# Altium PCB valix_PCB1_Layout1.PcbDoc (part 3 of 3)
Units mil, origin at the board's own origin, x right, y up, seen from the top; angles counter-clockwise.
Board outline 4500 x 2000 mil, 10 copper layers (Top Layer, L2 IntP, L3 Sig, L4 IntP GND, L5 Sig, L6 IntP GND, L7 IntP pwr, L8 Sig, L9 IntP GND, Bottom Layer), stack 81.302 mil thick; 152 components, 166 nets, 818 pads, 544 vias.
Unrouted connection lines stored in the file: 42.
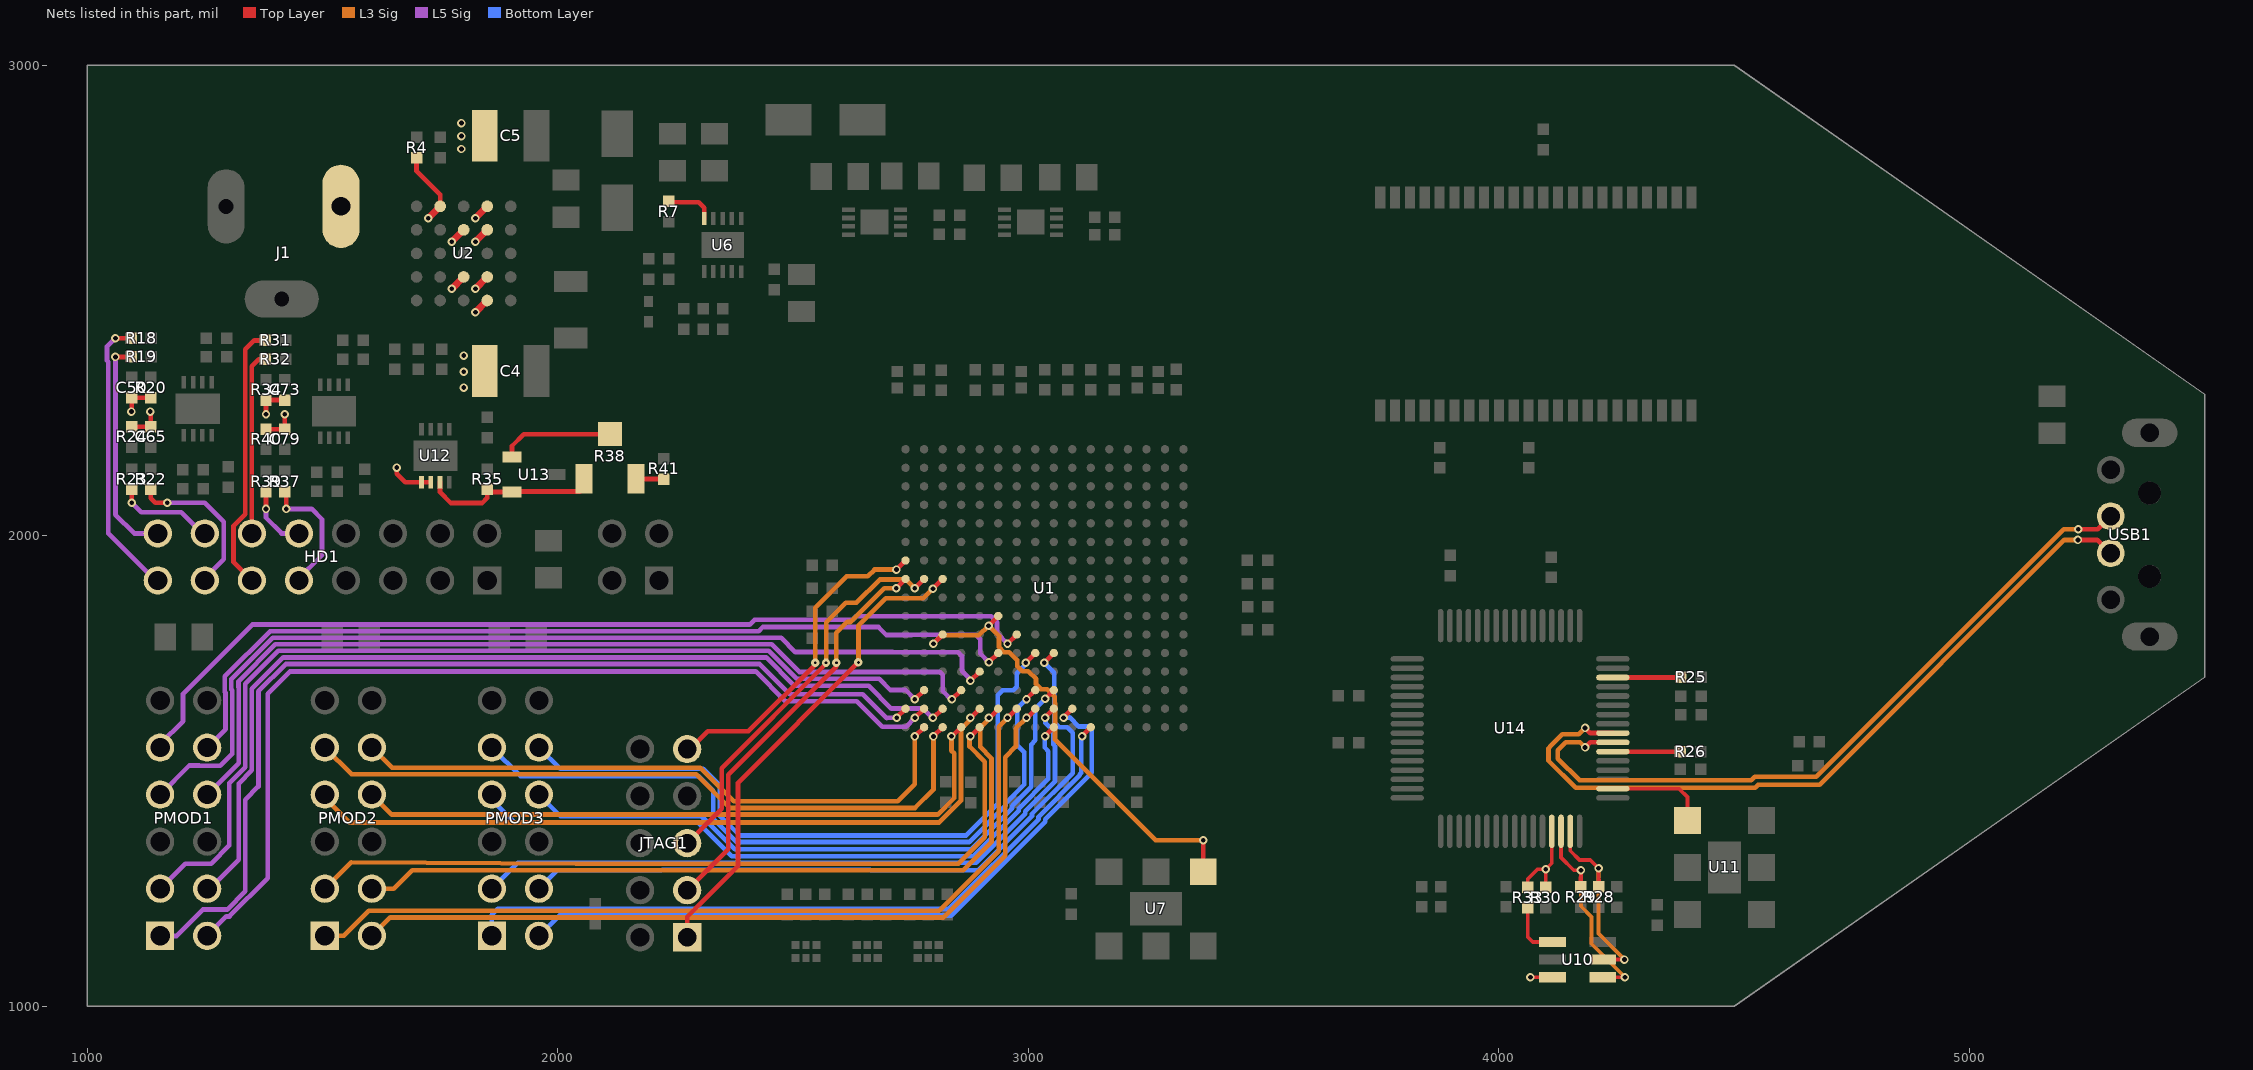
[diagram p11: the nets of this part, all layers, seen from the top]

## Via types
v1: diameter 18, hole 10, Top Layer to Bottom Layer, 261 vias
v2: diameter 18, hole 10, Top Layer to Bottom Layer, tented top, 261 vias
v3: diameter 19.68, hole 7.87, Top Layer to Bottom Layer, 12 vias
v4: diameter 18, hole 6, Top Layer to Bottom Layer, 10 vias

## Nets (pads, with @x,y where several pads share a name; then routed paths per layer and width w, separated by ;. In a path a pad name is that pad's centre, name@x,y a point inside that pad or via, vN(x,y) a via of type N, cw(c..) or ccw(c..) an arc to the next point about the centre after c; other vN are vias at no path point) (continued)
NetR4_1: R4.1 U2.E4 | length 159.4
  Top Layer w10: R4.1@1700,2803.35 1700,2775 1750,2725 U2.E4@1750,2700
  Top Layer w15: v1(1725,2675) U2.E4@1750,2700
NetR7_1: R7.1 U6.5 | length 103.1
  Top Layer w10: R7.1@2236.22,2710.63 2238.19,2708.66 2299.21,2708.66 2311.02,2696.85 U6.5@2311.02,2674.21
NetR25_2: R25.2 U14.14 | length 143.7
  Top Layer w10: U14.14@4242.13,1698.82 R25.2@4385.83,1698.82
NetR26_2: R26.2 U14.6 | length 142.9
  Top Layer w10: U14.6@4242.13,1541.34 R26.2@4385.01,1541.34
NetR28_2: R28.2 U10.5 U14.63 | length 419.1
  Top Layer w8: U14.63@4151.57,1372.05 4151.57,1330.71 4171.26,1311.02 4193.9,1311.02 v1(4211.61,1293.31) 4211.61,1270.67 ; U10.5@4220.47,1099.41 v1(4266.73,1099.41)
  Top Layer w10: R28.2@4212.06,1253.65 4212.06,1270.22
  L3 Sig w8: v1(4211.61,1293.31) 4211.61,1154.53 v1(4266.73,1099.41)
NetR29_2: R29.2 U10.4 U14.62 | length 458.1
  Top Layer w8: U14.62@4131.89,1372.05 4131.89,1316.31 4158.83,1289.37 v1(4174.21,1289.37) 4174.21,1274.29 ; U10.4@4220.47,1062.01 v1(4267.72,1062.01)
  Top Layer w10: R29.2@4174.06,1253.65 4174.06,1274.14
  L3 Sig w8: v1(4174.21,1289.37) 4174.21,1212.6 4196.85,1189.96 4196.85,1132.87 v1(4267.72,1062.01)
NetR30_2: R30.2 R33.1 U10.3 U14.61 | length 236.3
  Top Layer w8: R33.1@4061.02,1252.95 4061.02,1270.67 4081.69,1291.34 v1(4099.41,1291.34) ; v1(4066.93,1062.01) U10.3@4114.17,1062.01 ; R30.2@4099.41,1252.95 v1(4099.41,1291.34) ; U14.61@4112.2,1372.05 4112.2,1304.13 v1(4099.41,1291.34)
NetR33_2: R33.2 U10.1 | length 119.6
  Top Layer w8: R33.2@4061.02,1209.65 4061.02,1147.64 4071.85,1136.81 U10.1@4114.17,1136.81
NetR35_2: R35.2 R38.1 U12.3 U13.2 | length 384.4
  Top Layer w10: U12.3@1749.84,2113.9 1749.84,2092.81 1773.06,2069.6 1839.28,2069.6 1850,2080.31 R35.2@1850,2098.35 1852.65,2098.35 1858,2093 1902.35,2093 1903.35,2094 2047,2094 2057,2104 2055.87,2105.13 R38.1@2055.87,2120.79
NetR38_2: R38.2 U13.1 | length 242.2
  Top Layer w10: U13.1@1902.76,2167.4 1902.76,2190.76 1928,2216 2110.53,2216 R38.2@2110.98,2216.46
NetR38_3: R38.3 R41.1 | length 59.1
  Top Layer w10: R38.3@2166.1,2120.79 2224.56,2120.79 R41.1@2225,2120.35
NetU1_K6: U1.K6 U1.L3 U7.4 | length 981.9
  Top Layer w10: v2@2799.21,1771.48 U1.L3@2817.85,1790.12 ; v2(2915.53,1809.06) U1.K6@2935.96,1829.49 ; U7.4@3371.55,1285.94 v1(3371.55,1352.85)
  L3 Sig w10: v2(2798.23,1770.67) 2815.99,1788.43 2894.91,1788.43 v2(2915.53,1809.06) 2937.71,1786.87 2937.71,1763.04 2948.25,1752.5 2959.67,1752.5 2976.27,1735.9 2976.27,1722.86 2986.81,1712.32 2999.85,1712.32 3016.45,1695.72 3016.45,1684.47 3026.99,1673.93 3040.33,1673.93 3056,1658.26 3056,1645.11 3056.8,1644.31 3056.8,1566.36 3270.32,1352.85 v1(3371.55,1352.85)
NetU11_4: U11.4 U14.2 | length 215.4
  Top Layer w8: U14.2@4242.13,1462.6 4382.87,1462.6 4400.59,1444.88 U11.4@4400.59,1395.28
PMOD1-1: PMOD1.1 U1.R1 | length 2112.6
  Top Layer w10: v2(2720.47,1613.19) 2720.47,1614 U1.R1@2739.11,1632.64
  L5 Sig w10: PMOD1.1@1155,1150 1155.39,1149.61 1189.96,1149.61 1246.06,1205.71 1297.24,1205.71 1335.85,1244.31 1335.85,1439.2 1364,1467.35 1364,1669.12 1422.24,1727.36 2429.13,1727.36 2493.11,1663.39 2647.64,1663.39 2698.82,1612.2 2699.8,1613.19 v2(2720.47,1613.19)
PMOD1-2: PMOD1.2 U1.R2 | length 2050.2
  Top Layer w10: v2(2759.03,1613.19) U1.R2@2778.48,1632.64
  L5 Sig w10: PMOD1.2@1255,1150 1296,1191 1302.33,1191 1383.86,1272.52 1383.86,1664.37 1431.1,1711.61 2420.28,1711.61 2483.27,1648.62 2634.84,1648.62 2689.26,1594.2 2740.05,1594.2 v2(2759.03,1613.19)
PMOD1-3: PMOD1.3 U1.P2 | length 2065.2
  Top Layer w10: v2(2758.86,1652.39) U1.P2@2778.48,1672.01
  L5 Sig w10: PMOD1.3@1155,1250 1155.51,1250 1208.66,1303.15 1263.3,1303.15 1302.17,1342.01 1302.17,1474.41 1336,1508.24 1336,1683.55 1335.63,1683.92 1335.63,1685.04 1405.95,1755.36 2448.49,1755.36 2507.99,1695.87 2683.07,1695.87 2706.69,1672.24 2739,1672.24 v2(2758.86,1652.39)
PMOD1-4: PMOD1.4 U1.R3 | length 2023.8
  Top Layer w10: v2(2797.24,1613.19) 2798.4,1613.19 U1.R3@2817.85,1632.64
  L5 Sig w10: PMOD1.4@1255,1250 1260.15,1250 1321.85,1311.7 1321.85,1473.43 1350,1501.57 1350,1674.92 1416.45,1741.36 2442.69,1741.36 2502.95,1681.1 2660.43,1681.1 2708.66,1632.87 2776.4,1632.87 2796.09,1613.19 v2(2797.24,1613.19)
PMOD1-7: PMOD1.7 U1.N5 | length 2042.1
  Top Layer w10: v2(2876.97,1691.76) U1.N5@2896.59,1711.38
  L5 Sig w10: PMOD1.7@1155,1450 1216.81,1511.81 1238.03,1511.81 1238.85,1511 1282.65,1511 1308,1536.35 1308,1671.95 1306.43,1673.53 1306.43,1695.43 1394.36,1783.36 2474.51,1783.36 2504.92,1752.95 2711.45,1752.95 2711.97,1752.43 2850.91,1752.43 2858.91,1744.44 2858.91,1713.06 2876.97,1695 v2(2876.97,1691.76)
PMOD1-8: PMOD1.8 U1.P4 | length 1914.5
  Top Layer w10: v2@2836.61,1651.4 U1.P4@2857.22,1672.01
  L5 Sig w10: PMOD1.8@1255,1450 1322,1517 1322,1677.75 1321.63,1678.12 1321.63,1690.84 1400.15,1769.36 2454.29,1769.36 2513.02,1710.63 2812.01,1710.63 2817.91,1704.72 2817.91,1670.1 v2@2836.61,1651.4
  other v2: 2837.6,1652.56
PMOD1-9: PMOD1.9 U1.L7 | length 2021
  Top Layer w10: v2(2955.71,1770.5) U1.L7@2975.33,1790.12
  L5 Sig w10: PMOD1.9@1155,1550 1155,1557.56 1203.74,1606.3 1203.74,1664.37 1350.73,1811.36 2407.82,1811.36 2418.13,1821.67 2500.32,1821.67 2500.65,1821.33 2626.69,1821.33 2634.38,1829.02 2921.01,1829.02 2933.53,1816.51 2933.53,1792.68 v2(2955.71,1770.5)
PMOD1-10: PMOD1.10 U1.M6 | length 1912.8
  Top Layer w10: v2(2916.34,1731.13) U1.M6@2935.96,1750.75
  L5 Sig w10: PMOD1.10@1255,1550 1294,1589 1294,1666.15 1292.43,1667.73 1292.43,1701.23 1388.56,1797.36 2426.7,1797.36 2435.44,1806.1 2681.35,1806.1 2698.54,1788.91 2751.82,1788.91 2752.56,1789.65 2888.5,1789.65 2897.64,1780.51 2897.64,1749.83 v2(2916.34,1731.13)
PMOD2-1: PMOD2.1 U1.R7 | length 1825.2
  Top Layer w10: v2@2955.88,1613.19 U1.R7@2975.33,1632.64
  L3 Sig w10: PMOD2.1@1505,1150 1545.67,1150 1598.67,1203 2810.28,1203 2936.79,1329.5 2936.79,1594.09 v2@2955.88,1613.19
  other v2: 2955.71,1613.19
PMOD2-2: PMOD2.2 U1.R8 | length 1754.1
  Top Layer w10: v2@2996.21,1612.28 U1.R8@3014.7,1630.78
  L3 Sig w10: PMOD2.2@1605,1150 1644,1189 2819.91,1189 2950.79,1319.88 2950.79,1529.53 2973.65,1552.39 2973.65,1590.77 2995.16,1612.28 v2@2996.21,1612.28
  other v2: 2996.06,1613.19
PMOD2-3: PMOD2.3 U1.T5 | length 1705.4
  Top Layer w10: v2@2875,1571.68 U1.T5@2896.59,1593.27
  L3 Sig w10: PMOD2.3@1505,1250 1561.1,1306.1 2038.39,1303.15 2851.38,1303.15 2907.48,1359.25 2907.48,1519.69 2875,1552.17 v2@2875,1571.68
  other v2: 2876.97,1573.82
PMOD2-4: PMOD2.4 U1.R6 | length 1667.1
  Top Layer w10: v2@2916.48,1612.28 2935.96,1631.76 U1.R6@2935.96,1632.64
  L3 Sig w10: PMOD2.4@1605,1250 1651.57,1250 1690.57,1289 2861.83,1289 2921.48,1348.65 2921.48,1527.34 2897.64,1551.18 2897.64,1592.52 2916.48,1611.36 v2@2916.48,1612.28
  other v2: 2916.34,1613.19
PMOD2-7: PMOD2.7 U1.R5 | length 1608.2
  Top Layer w10: v2@2876.16,1612.2 U1.R5@2896.59,1632.64
  L3 Sig w10: PMOD2.7@1505,1450 1505,1442.83 1557.09,1390.75 2810.15,1390.75 2857,1437.59 2857,1589.68 v2@2876.16,1608.83
  other v2: 2876.97,1613.19
PMOD2-8: PMOD2.8 U1.T4 | length 1431.7
  Top Layer w10: v2(2836.61,1573.82) 2837.77,1573.82 U1.T4@2857.22,1593.27
  L3 Sig w10: PMOD2.8@1605,1450 1647.52,1407.48 2807.09,1407.48 2842.36,1442.76 2842.36,1537.56 2836.61,1543.31 v2(2836.61,1573.82)
PMOD2-9: PMOD2.9 U1.T3 | length 1503.4
  Top Layer w10: v2(2798.23,1573.65) U1.T3@2817.85,1593.27
  L3 Sig w10: PMOD2.9@1505,1550 1561.89,1493.11 2294.29,1493.11 2365.92,1421.48 2759.08,1421.48 2798.23,1460.63 v2(2798.23,1573.65)
PMOD2-10: PMOD2.10 U1.T2 | length 1345.1
  Top Layer w10: v2(2758.86,1573.65) U1.T2@2778.48,1593.27
  L3 Sig w10: PMOD2.10@1605,1550 1647.89,1507.11 2302.93,1507.11 2374.02,1436.02 2722.44,1436.02 2758.86,1472.44 v2(2758.86,1573.65)
PMOD3-1: PMOD3.1 U1.T11 | length 1531.9
  Top Layer w10: v2@3112.2,1572.66 U1.T11@3132.81,1593.27
  Bottom Layer w10: PMOD3.1@1860,1150 1860,1194.65 1872.27,1206.91 2830.63,1206.91 3021.65,1397.93 3021.65,1402.97 3109.47,1490.79 3109.47,1493.33 3112.2,1496.06 v2@3112.2,1572.66
  other v2: 3114.17,1573.82
PMOD3-2: PMOD3.2 U1.R10 | length 1507.9
  Top Layer w10: v2@3074.8,1614 U1.R10@3093.44,1632.64
  Bottom Layer w10: PMOD3.2@1960,1150 2002.91,1192.91 2836.43,1192.91 3035.65,1392.13 3035.65,1397.17 3134.84,1496.36 3134.84,1565.78 3134.5,1566.13 3134.5,1584.99 3125,1594.49 3107.28,1594.49 3087.77,1614 v2@3074.98,1614
  other v2: 3074.8,1613.19
PMOD3-3: PMOD3.3 U1.R9 | length 1464.6
  Top Layer w10: v2@3036.59,1615.16 U1.R9@3054.07,1632.64
  Bottom Layer w10: PMOD3.3@1860,1250 1915.12,1305.12 2363.95,1305.12 2364.17,1304.9 2889.01,1304.9 2993.65,1409.53 2993.65,1414.56 3056.57,1477.49 3056.57,1552.94 3053.43,1556.08 3053.43,1585.23 3036.59,1602.08 v2@3036.59,1615.16
  other v2: 3035.43,1613.19
PMOD3-4: PMOD3.4 U1.M9 | length 1538.4
  Top Layer w10: v2(3033.64,1730.32) U1.M9@3054.07,1750.75
  Bottom Layer w10: PMOD3.4@1960,1250 1999.37,1289.37 2221.01,1289.37 2222,1290.35 2663.31,1290.35 2664.3,1289.37 2893.29,1289.37 3007.65,1403.73 3007.65,1408.77 3094.2,1495.32 3094.2,1581.03 3082.43,1592.8 3065.66,1592.8 3055.12,1603.35 3055.12,1708.83 v2(3033.64,1730.32)
PMOD3-7: PMOD3.7 U1.T9 | length 1436.2
  Top Layer w10: v2@3034.6,1574.88 3035.68,1574.88 v2@3041.06,1580.25 ; v2@3041.06,1580.29 U1.T9@3054.03,1593.27
  Bottom Layer w10: PMOD3.7@1860,1450 1860,1439.21 1908.68,1390.53 2298.33,1390.53 2369.96,1318.9 2883.22,1318.9 2979.65,1415.33 2979.65,1420.36 3042.57,1483.29 3042.57,1542.07 3034.6,1550.05 v2@3034.6,1574.88
  other v2: 3035.43,1573.82
PMOD3-8: PMOD3.8 U1.P9 | length 1377.6
  Top Layer w10: v2(3035.43,1653.37) U1.P9@3054.07,1672.01
  Bottom Layer w10: PMOD3.8@1960,1450 2005.47,1404.53 2304.13,1404.53 2308.29,1400.37 2309.39,1400.37 2376.1,1333.66 2878.18,1333.66 2965.65,1421.13 2965.65,1426.16 3005.91,1466.42 3005.91,1556.32 3014.76,1565.18 3014.76,1632.7 v2(3035.43,1653.37)
PMOD3-9: PMOD3.9 U1.P8 | length 1525.3
  Top Layer w10: v2(2996.06,1652.56) 2996.06,1653.37 U1.P8@3014.7,1672.01
  Bottom Layer w10: PMOD3.9@1860,1550 1921,1489 ; 1921.17,1489.17 2299.21,1489.17 2330.49,1457.9 2330.49,1399.07 2380.37,1349.19 2873.91,1349.19 2951.65,1426.93 2951.65,1431.96 2991.14,1471.46 2991.14,1540.35 2976.38,1555.12 2976.38,1633.69 2995.25,1652.56 v2(2996.06,1652.56)
PMOD3-10: PMOD3.10 U1.M8 | length 1481.5
  Top Layer w10: v2(2994.27,1730.32) U1.M8@3014.7,1750.75
  Bottom Layer w10: PMOD3.10@1960,1550 2005.08,1504.92 2309.06,1504.92 2344.49,1469.49 2344.49,1404.87 2386.17,1363.19 2868.11,1363.19 2935.04,1430.12 2935.04,1661.42 2945.17,1671.54 2967.8,1671.54 2975.39,1679.13 2975.39,1708.07 v2@2994.27,1726.94
RTN1: HD1.15 R18.1 | length 598.5
  Top Layer w10: v1(1060,2420) R18.1@1093.35,2420
  L5 Sig w10: v1(1060,2420) 1042,2402 1042,2372.54 1045,2369.54 1045,2005 HD1.15@1145,1905
RTN2: HD1.13 R22.1 | length 337.7
  Top Layer w10: R22.1@1135,2098.35 1135,2080 1145,2070 v1(1170,2070)
  L5 Sig w10: v1(1170,2070) 1250,2070 1290,2030 1290,1950 HD1.13@1245,1905
RTN3: HD1.11 R31.1 | length 569.4
  Top Layer w10: HD1.11@1350,1905 1311,1944 1311,2021.15 1336,2046.15 1336,2396 1355,2415 R31.1@1378.35,2415 R31.1@1378.35,2416.65
RTN4: HD1.9 R37.1 | length 281.1
  Top Layer w10: R37.1@1420,2093.35 1423,2096.35 v1(1423,2057)
  L5 Sig w10: v1(1423,2057) 1477,2057 1499,2035 1499,1959 HD1.9@1445,1905
TCK: JTAG1.1 U1.H3 | length 1033.2
  Top Layer w10: JTAG1.1@2275,1146.73 2275,1190.35 2383.13,1298.49 2383.13,1475.13 v4(2639,1731) ; v2(2797.24,1887.62) U1.H3@2817.85,1908.23
  L3 Sig w10: v4(2639,1731) 2639,1809.28 2696.9,1867.17 2766.25,1867.17 2766.3,1867.13 2776.75,1867.13 v2(2797.24,1887.62)
TDI: JTAG1.9 U1.G1 | length 702.5
  Top Layer w10: JTAG1.9@2275,1546.73 2280.99,1546.73 2318.68,1584.43 2405.2,1584.43 2547,1726.23 v4@2547,1727 ; v2@2719.66,1926.75 v2(2719.66,1928.15) U1.G1@2739.11,1947.6
  L3 Sig w10: v4@2547,1727 2547,1847.35 2613.65,1914 2659,1914 2673.15,1928.15 v2(2719.66,1928.15)
  other v4: 2547,1730
TDO: JTAG1.3 U1.H1 | length 872.9
  Top Layer w10: JTAG1.3@2275,1246.73 2362.2,1333.94 2362.2,1492.13 2592,1721.92 v4(2592,1730) ; v2(2719.49,1888.61) U1.H1@2739.11,1908.23
  L3 Sig w10: v4(2592,1730) 2592,1793.77 2615.16,1816.93 2622.29,1816.93 2693.97,1888.61 v2(2719.49,1888.61)
TMS: JTAG1.5 U1.H2 | length 856.7
  Top Layer w10: JTAG1.5@2275,1346.73 2348.2,1419.94 2348.2,1505.75 2570,1727.54 v4(2570,1730) ; v2(2758.86,1888.61) U1.H2@2778.48,1908.23
  L3 Sig w10: v4(2570,1730) 2570,1728.45 2570.22,1728.22 2570.22,1815.78 2612.12,1857.67 2634.67,1857.67 2684,1907 2740.46,1907 v2(2758.86,1888.61)
USB_N: U14.7 USB1.2 | length 1579.1
  Top Layer w10: v1(4183.07,1550.2) 4193.9,1561.02 U14.7@4242.13,1561.02 ; v1(5231.3,2013.78) 5272.2,2013.78 USB1.2@5300,2041.57
  L3 Sig w10: v1(4183.07,1550.2) 4172.24,1561.02 4141.73,1561.02 4125,1544.29 4125,1526.58 4171.26,1480.32 4536.13,1480.32 4543.57,1487.76 4674.34,1487.76 5200.37,2013.78 v1(5231.3,2013.78)
  Bottom Layer w10: USB1.2@5298.78,2040.35 USB1.2@5300,2041.57
USB_P: U14.8 USB1.3 | length 1637
  Top Layer w10: v1(4183.07,1591.54) 4193.9,1580.71 U14.8@4242.13,1580.71 ; v1(5230.31,1991.14) 5271.69,1991.14 USB1.3@5300,1962.83
  L3 Sig w10: v1(4183.07,1591.54) 4169.56,1578.02 4134.69,1578.02 4108,1551.33 4108,1550.91 4105.31,1548.23 4105.31,1522.22 4162.97,1464.57 4544.43,1464.57 4550.62,1470.76 4681.39,1470.76 5201.77,1991.14 v1(5230.31,1991.14)
  Bottom Layer w15: USB1.3@5297.8,1960.63 USB1.3@5300,1962.83
VBUSS: C4.1 C5.1 J1.1 U2.A2 U2.B2 U2.B3 U2.D2 U2.D3 U2.E2 | length 226.6
  Top Layer w15: v1(1775,2525) U2.B3@1800,2550 ; v1(1775,2625) U2.D3@1800,2650 ; v1(1825,2475) U2.A2@1850,2500 ; v1(1825,2525) U2.B2@1850,2550 ; v1(1825,2625) U2.D2@1850,2650 ; v1(1825,2675) U2.E2@1850,2700 ; C4.1@1844.88,2350 C4.1@1850,2355.12 ; C5.1@1844.88,2850 C5.1@1850,2844.88
  other v1: 1800.2,2314.96 1800.2,2348.43 1800.2,2382.87 1795.28,2821.85 1795.28,2849.41 1795.28,2876.97
VIN1: HD1.16 R19.1 | length 469.9
  Top Layer w10: v1(1060,2380) R19.1@1093.35,2380
  L5 Sig w10: v1(1060,2380) 1060,2045 1100,2005 HD1.16@1145,2005
VIN2: HD1.14 R23.1 | length 205.3
  Top Layer w10: v1(1095,2070) R23.1@1095,2098.35
  L5 Sig w10: v1(1095,2070) 1115,2050 1200,2050 HD1.14@1245,2005
VIN3: HD1.12 R32.1 | length 389.6
  Top Layer w10: HD1.12@1350,2005 1350,2360 1365,2375 R32.1@1378.35,2375
VIN4: HD1.10 R39.1 | length 134
  Top Layer w10: v1(1380,2057) R39.1@1380,2093.35
  L5 Sig w10: v1(1380,2057) 1380,2038 1413,2005 HD1.10@1445,2005
VREF_ID: C50.2 C65.2 C73.2 C79.2 R20.2 R24.2 R34.2 R40.2 U12.1 U12.2 | length 376.9
  Top Layer w10: v1(1094,2264) 1095,2265 C50.2@1095,2293.35 R20.2@1135,2293.35 ; R24.2@1095,2231.65 C65.2@1135,2231.65 1135,2263 v1(1134,2264) ; R40.2@1380,2226.65 C79.2@1420,2226.65 v1(1420,2258) ; v1(1380,2258) R34.2@1380,2288.35 C73.2@1420,2288.35 ; v1(1658,2145) 1658,2132 1676.1,2113.9 U12.1@1710.47,2113.9 U12.2@1730.16,2113.9
pads on no net: JTAG1.6 JTAG1.7 U1.A9 U1.A10 U1.A13 U1.A14 U1.A15 U1.B4 U1.B5 U1.B6 U1.B7 U1.B8 U1.B13 U1.B15 U1.B16 U1.C3 U1.C4 U1.C5 U1.C6 U1.C12 U1.C13 U1.C16 U1.D2 U1.D4 U1.D9 U1.D12 U1.D16 U1.E3 U1.E7 U1.E8 U1.E9 U1.E10 U1.E11 U1.F2 U1.F3 U1.F4 U1.F5 U1.F7 U1.F8 U1.F9 U1.F10 U1.F11 U1.F12 U1.G5 U1.G11 U1.G12 U1.H5 U1.H6 U1.H11 U1.J1 U1.J2 U1.J3 U1.J5 U1.J6 U1.K2 U1.K11 U1.K12 U1.K14 U1.L1 U1.L6 U1.L8 U1.L11 U1.L12 U1.L15 U1.L16 U1.M3 U1.M7 U1.M14 U1.N13 U1.P5 U1.P6 U1.P10 U1.P11 U1.P14 U1.R4 U1.R14 U1.T6 U1.T7 U1.T8 U1.T12 U1.T13 U1.T14 U1.T15 U2.A5 U2.B4 U2.C3 U2.D4 U2.E5 U5.28 U7.1 U7.2 U7.5 U7.7 U8.9 U9.9 U11.1 U11.2 U11.5 U11.7 U12.7 U14.3 U14.13 U14.26 U14.27 U14.28 U14.29 U14.30 U14.32 U14.33 U14.34 U14.36 U14.48 U14.52 U14.53 U14.54 U14.55 U14.57 U14.58 U14.59 U14.60 USB1.0
copper on no net: | length 2436.2
  Top Layer w7: v2@3274.6,1572.83 v2@3274.6,1577.58 ; 3290.29,1588.52 3290.29,1593.27
  Top Layer w10: v2(2719.43,1770.43) 2739.11,1790.12 ; v2(2719.43,1849.17) 2739.11,1868.86 ; v2(2758.8,1809.8) 2778.48,1829.49 ; v2(2758.8,1849.17) 2778.48,1868.86 ; v2(2758.8,1967.28) 2778.48,1986.97 ; v2(2758.8,2046.02) 2778.48,2065.71 ; v2(2798.17,1731.06) 2817.85,1750.75 ; v2(2798.17,1849.17) 2817.85,1868.86 ; v2(2798.17,1967.28) 2817.85,1986.97 ; v2(2798.17,2006.65) 2817.85,2026.34 ; v2(2798.17,2085.39) 2817.85,2105.08 ; v2(2837.54,1612.95) 2857.22,1632.64 ; v2(2837.54,1967.28) 2857.22,1986.97 ; v2(2837.54,2046.02) 2857.22,2065.71 ; v2(2837.54,2085.39) 2857.22,2105.08 ; v2(2837.54,2124.76) 2857.22,2144.45 ; v2(2876.91,1652.32) 2896.59,1672.01 ; v2(2876.91,1849.17) 2896.59,1868.86 ; v2(2876.91,1888.54) 2896.59,1908.23 ; v2(2876.91,1927.91) 2896.59,1947.6 ; v2(2876.91,1967.28) 2896.59,1986.97 ; v2(2876.91,2085.39) 2896.59,2105.08 ; v2(2876.91,2124.76) 2896.59,2144.45 ; v2(2916.28,1573.58) 2935.96,1593.27 ; v2(2916.28,1652.32) 2935.96,1672.01 ; v2(2916.28,1849.17) 2935.96,1868.86 ; v2(2916.28,1888.54) 2935.96,1908.23 ; v2(2916.28,2085.39) 2935.96,2105.08 ; v2(2916.28,2124.76) 2935.96,2144.45 ; v2@2917.5,1771.65 2935.96,1790.12 ; v2(2955.65,1573.58) 2975.33,1593.27 ; v2(2955.65,1731.06) 2975.33,1750.75 ; v2(2955.65,1967.28) 2975.33,1986.97 ; v2(2955.65,2006.65) 2975.33,2026.34 ; v2(2955.65,2124.76) 2975.33,2144.45 ; v2(2995.02,1573.58) 3014.7,1593.27 ; v2(2995.02,1770.43) 3014.7,1790.12 ; v2(2995.02,1967.28) 3014.7,1986.97 ; v2(2995.02,2006.65) 3014.7,2026.34 ; v2(2995.02,2124.76) 3014.7,2144.45 ; v2(3034.39,1967.28) 3054.07,1986.97 ; v2(3034.39,2006.65) 3054.07,2026.34 ; v2(3034.39,2046.02) 3054.07,2065.71 ; v2(3034.39,2164.13) 3054.07,2183.82 ; v2(3073.76,1967.28) 3093.44,1986.97 ; v2(3073.76,2006.65) 3093.44,2026.34 ; v2(3073.76,2164.13) 3093.44,2183.82 3091.76,2182.13 ; v2(3074,1652.57) 3093.44,1672.01 ; v2(3113.13,1652.32) 3132.81,1672.01 ; v2(3113.13,1770.43) 3132.81,1790.12 ; v2(3113.13,1809.8) 3132.81,1829.49 ; v2(3113.13,1888.54) 3132.81,1908.23 ; v2(3113.13,1927.91) 3132.81,1947.6 ; v2(3113.13,1967.28) 3132.81,1986.97 ; v2(3113.13,2006.65) 3132.81,2026.34 ; v2(3152.5,1573.58) 3172.18,1593.27 ; v2(3152.5,1770.43) 3172.18,1790.12 ; v2(3152.5,1809.8) 3172.18,1829.49 ; v2(3152.5,1927.91) 3172.18,1947.6 ; v2(3152.5,1967.28) 3172.18,1986.97 ; v2(3152.5,2046.02) 3172.18,2065.71 ; v2(3152.5,2085.39) 3172.18,2105.08 ; v2(3191.87,1573.58) 3211.55,1593.27 ; v2(3191.87,1691.69) 3211.55,1711.38 ; v2(3191.87,2085.39) 3211.55,2105.08 ; v2(3191.87,2124.76) 3211.55,2144.45 ; v2(3191.87,2164.13) 3211.55,2183.82 ; v2(3231,1652.09) 3250.92,1672.01 ; v2(3231.24,1573.58) 3250.92,1593.27 ; v2(3231.24,1612.95) 3250.92,1632.64 ; v2(3231.24,1731.06) 3250.92,1750.75 ; v2(3231.24,1809.8) 3250.92,1829.49 ; v2(3231.24,2164.13) 3250.92,2183.82 ; v2(3270.61,1770.43) 3290.29,1790.12 ; v2(3270.61,2124.76) 3290.29,2144.45 ; v2(3270.61,2164.13) 3290.29,2183.82 ; v2@3274.6,1577.58 3290.29,1593.27 ; v2(3309.98,1770.43) 3329.66,1790.12 ; v2@3309.98,2046.02 3329.66,2065.71 ; v2(3309.98,2085.39) 3329.66,2105.08 ; v2(3309.98,2124.76) 3329.66,2144.45
  Top Layer w15: v1(1675,2475) 1700,2500 ; v1(1675,2675) 1700,2700 ; v1(1725,2525) 1750,2550 ; v1(1725,2625) 1750,2650 ; v1(1775,2575) 1800,2600
  other v2: 3271.65,1573.82 2916.34,1770.67 3310.04,2046.26
  other v3: 3232.18,1187.52 3271.55,1187.52 3310.92,1187.52 3232.18,1226.89 3271.55,1226.89 3310.92,1226.89 4459.65,1255.91 4499.02,1255.91 4459.65,1295.28 4499.02,1295.28 4459.65,1334.65 4499.02,1334.65

## Polygon pours and split planes (outlines as drawn)
3.3VEXT on Top Layer "5VINT_L01_P-001" (solid, pour order 68): 1875,2475 1875,2550 1900,2575 1905,2575 1965,2575 1965,2550 1965,2535 1950,2550 1930,2550 1920,2540 1920,2485 1910,2475
5VINT on Top Layer "5VINT_L01_P-001" (solid, pour order 66): 1875,2715 1875,2625 1875,2635 1885,2625 1920,2625 1930,2635 1930,2665 1975,2665 1980,2665 1988.84,2656.16 2000,2660 2000,2695 2000,2700 1990,2700 1980,2690 1930,2690 1925,2695 1925,2715 1915,2725 1885,2725
5VINT on Top Layer "5VINT_L01_P062" (solid, pour order 62): 1989.17,2656.5 1989.17,2623.03 1989.17,2621.06 1996.06,2614.17 2082.68,2614.17 2125.98,2614.17 2159.45,2647.64 2159.45,2656.5 1989.17,2656.5
2.5V on Top Layer "2.5V_L01_P050" (solid, pour order 50): 3067.91,2670.28 3083.66,2670.28 3095.47,2682.09 3146.65,2733.27 3146.65,2738.19 3145.67,2744.09 3102.36,2734.25 3067.91,2697.83
3.3V on Top Layer "3.3V_L01_P048" (solid, pour order 48): 2903.54,2736.22 2907.48,2736.22 2941.93,2701.77 2941.93,2700.79 2941.93,2653.54 2922.24,2653.54 2905.51,2670.28 2905.51,2689.96 2862.2,2732.37 2862.2,2736.22
GND on Top Layer "GND_L01_P046" (solid, pour order 46): 2978.35,2689.96 2978.35,2711.61 2954.72,2735.24 2954.72,2792.57 2961.19,2798.23 3050.2,2798.23 3055.12,2793.31 3055.12,2735.24 3031.5,2711.61 3031.5,2689.96
1.2V on Top Layer "1.2V_L01_P042" (solid, pour order 42): 2742.26,2670.28 2791.34,2713.58 2808.07,2728.35 2808.07,2739.17 2808.07,2747.05 2776.57,2747.05 2736.22,2706.69 2736.22,2670.28
GND on Top Layer "GND_L01_P040" (solid, pour order 40): 2628.94,2783.46 2627.95,2782.48 2627.95,2735.24 2645.67,2717.52 2647.64,2715.55 2647.64,2690.94 2700.79,2690.94 2700.79,2715.55 2722.44,2737.2 2722.44,2783.46 2628.94,2783.46
3.3V on Top Layer "3.3V_L01_P038" (solid, pour order 38): 2581.69,2738.19 2581.69,2724.41 2608.27,2700.79 2609.25,2699.8 2609.25,2652.56 2596.46,2652.56 2590.55,2658.46 2537.4,2711.61 2537.4,2738.19
2P5V_FPGA on Top Layer "Top Layer-No Net" (solid, pour order 8): 3170.57,2300.67 3170.57,2272.67 3176.57,2266.67 3178.57,2266.67 3236.57,2266.67 3242.57,2272.67 3243.57,2273.67 3243.57,2301.67 3170.57,2301.67
GND on Top Layer "Top Layer-No Net" (solid, pour order 0): 2808.57,1424.67 2808.57,1388.67 2814.57,1382.67 3236.58,1382.67 3242.57,1388.67 3242.57,1424.67
4.5V on Top Layer "Top Layer-No Net" (solid, pour order 14): 2125,2950 2416.14,2950 2450,2916.14 2450,2850 2475,2850 2425,2850 2413.09,2861.91 2400,2875 2150,2875 2125,2900 2094.49,2900 2094.49,2919.49
GND on Top Layer "Top Layer-No Net" (solid, pour order 18): 2062.01,2401.57 2062.01,2351.01 1998.31,2295.28 1979.33,2295.28 1979.33,2402.56 2062.01,2402.56 2062.01,2397.64
3.3VEXT on Top Layer "Top Layer-No Net" (solid, pour order 20): 2110,2575 2098.39,2586.61 1975,2585 1960,2575 1960,2530 1970,2520 1976.38,2519.68 2000,2519.68 2031.5,2519.68 2099.68,2519.68 2110,2530
GND on Top Layer "Top Layer-No Net" (solid, pour order 22): 2213.58,2795.28 2396.65,2795.28 2403.54,2788.39 2403.54,2752.95 2396.65,2746.06 2381.89,2746.06 2375.98,2751.97 2213.98,2751.97 2206.69,2758.04 2206.69,2789.37
4.5V on Top Layer "Top Layer-No Net" (solid, pour order 24): 2346.46,2685.04 2346.46,2700.79 2354.33,2708.66 2393.7,2708.66 2425.2,2740.16 2425,2850 2433.07,2858.27 2480.32,2858.27 2480.31,2720.47 2444.88,2685.04
GND on Top Layer "Top Layer-No Net" (solid, pour order 26): 2279.53,2590.55 2423.23,2590.55 2442.91,2570.87 2554.13,2570.87 2554.13,2625 2533.46,2645.67 2500,2645.67 2279.53,2645.67 2258.86,2625 2258.86,2611.22
3.3V on Top Layer "Top Layer-No Net" (solid, pour order 28): 2365.16,2551.18 2365.16,2541.34 2488.19,2418.31 2537.68,2418.31 2555.12,2436.61 2555.12,2483.27 2481.3,2483.27 2475.39,2487.2 2475.39,2511.81 2472.44,2514.76 2447.83,2514.76 2411.42,2551.18
GND on Top Layer "Top Layer-No Net" (solid, pour order 30): 2044.84,2777.4 2044.84,2886.65 2026.98,2903.54 1979.88,2903.54 1979.88,2847.28 1978.35,2795.28 1988.19,2785.43 1988.19,2775.83 2032.48,2775.83 2037.4,2774.61 2044.84,2775.83
GND on Top Layer "GND_L01_P034" (solid, pour order 34): 3022,2360 3022,2375 3047,2400 3109,2400 3169,2400 3194,2375 3194,2360
GND on Top Layer "GND_L01_P036" (solid, pour order 36): 2750.98,2368.11 2793.31,2368.11 2824.84,2396.69 2874.02,2396.69 2910.43,2367.13 2947.83,2367.13 2947.83,2344.49 2944.88,2341.54 2750.98,2341.54
5V_USB on Top Layer "5V_USB_L01_P054" (solid, pour order 54): 5146.65,2212.6 5146.65,2180.12 5230.31,2096.46 5317.91,2096.46 5339.57,2096.46 5347.44,2104.33 5347.44,2163.39 5332.68,2177.17 5304.13,2177.17 5268.7,2212.6 5147.64,2212.6
5V_USB on Top Layer "5V_USB_L01_P056" (solid, pour order 56): 2687.01,2916.34 2687.01,2918.31 2701.77,2933.07 2755.91,2933.07 2770.67,2918.31 2770.67,2849.41 2755.91,2834.65 2701.77,2834.65 2687.01,2849.41 2687.01,2918.31
VBUSS on Top Layer "VBUSS_L01_P058" (solid, pour order 58): 1820.87,2904.53 1797.24,2904.53 1779.53,2886.81 1779.53,2814.96 1779.53,2812.99 1797.24,2795.28 1820.87,2795.28
VBUSS on Top Layer "VBUSS_L01_P060" (solid, pour order 60): 1817.91,2404.53 1808.07,2404.53 1796.26,2404.53 1786.42,2394.69 1786.42,2306.1 1786.42,2305.12 1796.26,2295.28 1820.87,2295.28 1820.87,2403.54 1819.88,2404.53
1.2V on L8 Sig "1.2V_L08_P052" (solid, pour order 52): 2738.19,2637.58 2823.82,2554.64 2823.82,2515.33 2970.27,2368.89 3002.95,2368.89 3002.95,2474.98 2970.25,2507.68 2798.02,2679.91 2798.02,2727.36 2792.27,2738.19 2766.45,2738.19 2738.19,2709.93
VREF_ID on L8 Sig "Top Layer-No Net" (solid, pour order 32): 1072,2291 1072,2252 1072,2229 1087,2214 1611,2214 1612,2214 1625,2201 1635,2191 1635,2129 1645,2119 1670,2119 1681,2130 1681,2225 1597,2309 1090,2309
2P5V_FPGA on L8 Sig "Top Layer-No Net" (solid, pour order 10): 2868.13,2319.72 2875.92,2327.52 2896.95,2327.52 2902.5,2319.89 2902.5,2257.64 2894.62,2247.8 2894.62,2105.08 2894.62,1893.46 2894.62,1568.67 2894.62,1468.67 2888.57,1463.67 2861.74,1463.67 2857.1,1470.1 2857.1,1531.15 2813.13,1567.67 2813.13,2235.71 2868.13,2288.15
2P5V_FPGA on L8 Sig "Top Layer-No Net" (solid, pour order 6): 3250.57,2331.67 3249.57,2330.67 3158.57,2330.67 3158.57,2261.67 3142.57,2245.67 3136.57,2239.67 3142.57,1514.67 3142.58,1474.07 3153.74,1460.67 3182.57,1460.67 3187.57,1465.67 3187.57,1497.67 3250.57,1554.67 3250.57,2301.67 3250.57,2325.67 3245.57,2330.67
1P2V_FPGA on L8 Sig "Top Layer-No Net" (solid, pour order 2): 2910.57,2317.67 2910.57,2252.67 2901.57,2243.67 2901.57,1470.67 2916.57,1455.67 3115.57,1455.67 3132.81,1472.91 3132.81,1550.91 3132.81,2247.43 3108.57,2271.67 3108.57,2318.67 3094.57,2332.67 2925.57,2332.67
1.8V on L3 Sig "5VINT_L01_P-001" (solid, pour order 64): 3993.11,1545 4060.04,1545 4060.04,1485 3993.11,1485
5V_USB on L2 IntP (split plane): 5479.9,2289.54 5479.9,2138.96 5378.94,2138.96 5376.99,2138.57 5375.33,2137.46 5338.44,2100.57 5166.48,2100.57 4447.5,2819.55 4445.85,2820.65 4443.9,2821.04 2590.69,2821.04 2576.95,2834.79 2576.95,2979.9 4493.67,2979.9
3.3V on L2 IntP (split plane): 2566.75,2832.68 2567.14,2830.73 2568.25,2829.07 2584.98,2812.34 2586.63,2811.24 2588.58,2810.85 4441.79,2810.85 5160.77,2091.87 5162.42,2090.76 5164.37,2090.37 5340.55,2090.37 5342.5,2090.76 5344.16,2091.87 5381.05,2128.76 5479.9,2128.76 5479.9,1710.46 4493.67,1020.1 1020.1,1020.1 1020.1,2979.9 2566.75,2979.9
GND on L4 IntP GND (split plane): 5479.9,2289.54 5479.9,1710.46 4493.67,1020.1 1020.1,1020.1 1020.1,2449.9 1597.89,2449.9 1610.88,2436.91 1610.88,2225.98 1611.27,2224.02 1612.37,2222.37 1614.02,2221.27 1615.98,2220.88 1617.93,2221.27 1619.58,2222.37 1620.69,2224.02 1621.07,2225.98 1621.07,2437.64 1620.69,2439.6 1619.96,2440.68 1619.71,2441.95 1618.6,2443.6 1603.6,2458.6 1601.95,2459.71 1600,2460.1 1020.1,2460.1 1020.1,2979.9 4493.67,2979.9
GND on L6 IntP GND (split plane): 5479.9,2289.54 5479.9,1710.46 4493.67,1020.1 1020.1,1020.1 1020.1,2452.45 1598.94,2452.45 1612.45,2438.94 1612.45,2225 1612.64,2224.02 1613.2,2223.2 1614.02,2222.64 1615,2222.45 1615.98,2222.64 1616.8,2223.2 1617.36,2224.02 1617.55,2225 1617.55,2440 1617.36,2440.98 1616.8,2441.8 1601.8,2456.8 1600.98,2457.36 1600,2457.55 1020.1,2457.55 1020.1,2979.9 4493.67,2979.9
1P2V_FPGA on L7 IntP pwr (split plane): 3256.48,2311.56 3256.48,2259.78 3247.79,2251.1 2874.36,2251.1 2869.67,2255.78 2869.67,2313.56 2882.69,2326.57 3241.46,2326.57
3.3V on L7 IntP pwr (split plane): 2962.77,1484.87 2963.6,1484.31 2964.57,1484.12 3082.57,1484.12 3083.55,1484.31 3084.38,1484.87 3095.13,1495.62 3116.63,1517.12 3140.63,1541.12 3187.52,1541.12 3200.03,1528.61 3200.03,1509.12 3200.03,1480.36 3196.77,1477.11 3196.22,1476.28 3196.03,1475.31 3196.03,1474.73 3186.52,1465.22 2866.63,1465.22 2852.12,1479.73 2852.12,1529.61 2870.63,1548.12 2899.52,1548.12
2P5V_FPGA on L7 IntP pwr (split plane): 3480.48,2151.07 3480.48,1611.78 3328.52,1459.82 2611.36,1459.82 2565.67,1505.51 2565.67,1983.49 2663.97,2081.79 2665.08,2083.44 2665.47,2085.39 2665.47,2299.82 2692.22,2326.57 2868.27,2326.57 2860.97,2319.27 2859.86,2317.62 2859.48,2315.67 2859.48,2253.67 2859.86,2251.72 2860.97,2250.06 2868.64,2242.4 2870.29,2241.29 2872.24,2240.9 3249.91,2240.9 3251.86,2241.29 3253.51,2242.4 3265.18,2254.06 3266.28,2255.72 3266.67,2257.67 3266.67,2313.67 3266.28,2315.62 3265.18,2317.27 3255.88,2326.57 3304.97,2326.57
VBUSS on L7 IntP pwr (split plane): 2564.9,2837.11 2362.89,2635.1 2177.24,2635.1 2175.29,2634.71 2173.64,2633.6 2151.43,2611.4 1937.01,2611.4 1935.06,2611.01 1933.4,2609.9 1927.02,2603.52 1863.82,2603.52 1861.87,2603.14 1860.21,2602.03 1846.79,2588.6 1845.68,2586.95 1845.3,2585 1845.3,2449.8 1845.68,2447.85 1846.79,2446.2 1865.49,2427.5 1884.67,2408.32 1884.67,2317.07 1865.01,2297.42 1672.39,2297.42 1621.24,2348.57 1621.24,2437.99 1620.85,2439.94 1619.75,2441.6 1592.74,2468.6 1591.08,2469.71 1589.13,2470.1 1020.1,2470.1 1020.1,2979.9 2564.9,2979.9
3.3VEXT on L7 IntP pwr (split plane): 2145.89,2252.84 2145.29,2251.95 2144.9,2250 2144.9,2183.75 2145.29,2181.8 2146.4,2180.15 2169.9,2156.64 2169.9,2076.25 2169.9,1977.11 2147.89,1955.1 2082.11,1955.1 2055.1,1982.11 2055.1,2300 2055.1,2482.48 2054.71,2484.43 2053.6,2486.09 2038.05,2501.64 2036.4,2502.74 2034.45,2503.13 1976.38,2503.13 1974.43,2502.74 1972.77,2501.64 1889.27,2418.13 1872.7,2434.71 1855.49,2451.91 1855.49,2582.89 1865.93,2593.33 1929.13,2593.33 1931.08,2593.72 1932.74,2594.82 1939.12,2601.2 2145.89,2601.2
2.5V on L7 IntP pwr (split plane): 5479.9,2289.54 5479.9,1710.46 4493.67,1020.1 1020.1,1020.1 1020.1,2459.9 1587.02,2459.9 1611.04,2435.88 1611.04,2346.46 1611.43,2344.51 1612.54,2342.85 1666.67,2288.72 1668.32,2287.61 1670.28,2287.22 1867.13,2287.22 1869.08,2287.61 1870.73,2288.72 1893.37,2311.36 1894.47,2313.01 1894.86,2314.96 1894.86,2409.31 1978.49,2492.93 2032.34,2492.93 2044.9,2480.37 2044.9,2300 2044.9,1980 2045.29,1978.05 2046.4,1976.4 2076.4,1946.4 2078.05,1945.29 2080,1944.9 2150,1944.9 2151.95,1945.29 2153.6,1946.4 2178.6,1971.4 2179.71,1973.05 2180.1,1975 2180.1,2076.25 2180.1,2158.75 2179.71,2160.7 2178.6,2162.35 2155.1,2185.86 2155.1,2247.16 2155.69,2248.05 2156.08,2250 2156.08,2601.98 2157.15,2602.69 2179.36,2624.9 2365,2624.9 2366.95,2625.29 2368.6,2626.4 2573.6,2831.4 2574.71,2833.05 2575.1,2835 2575.1,2979.9 4493.67,2979.9
GND on L9 IntP GND (split plane): 5479.9,2289.54 5479.9,1710.46 4493.67,1020.1 1020.1,1020.1 1020.1,2452.45 1598.94,2452.45 1612.45,2438.94 1612.45,2225 1612.64,2224.02 1613.2,2223.2 1614.02,2222.64 1615,2222.45 1615.98,2222.64 1616.8,2223.2 1617.36,2224.02 1617.55,2225 1617.55,2440 1617.36,2440.98 1616.8,2441.8 1601.8,2456.8 1600.98,2457.36 1600,2457.55 1020.1,2457.55 1020.1,2979.9 4493.67,2979.9

## Other copper
Top Layer:
  region net 3P3V_FPGA: 2709.57,2303.67 2756.57,2303.67 2826.71,2303.67 2826.71,2282.24 2819.13,2274.67 2760.57,2274.67 2718.57,2274.67 2709.57,2283.67
L4 IntP GND (plane layer: these items are gaps in the copper):
  lines w10: 1000,2455 1600,2455 1615,2440 ; 1615.98,2225.98 1615.98,2437.64
L6 IntP GND (plane layer: these items are gaps in the copper):
  lines w5: 1000,2455 1600,2455 1615,2440 1615,2225
L7 IntP pwr (plane layer: these items are gaps in the copper):
  lines w5: 2849.57,1478.67 2849.57,1530.67 2869.57,1550.67 2900.57,1550.67 2964.57,1486.67 3082.57,1486.67 3093.32,1497.42 3114.82,1518.92 3139.57,1543.67 3188.57,1543.67 3202.57,1529.67 3202.57,1509.12 3202.57,1479.31 3198.57,1475.31 3198.57,1473.67 3187.57,1462.67 2865.57,1462.67 2849.57,1478.67
  lines w10: 1000,2997.05 2570,2997.05 2570,2835 2365,2630 2177.24,2630 2153.54,2606.3 1937.01,2606.3 1929.13,2598.43 1863.82,2598.43 1850.39,2585 1850.39,2449.8 1869.09,2431.1 1889.27,2410.93 1976.38,2498.03 2034.45,2498.03 2050,2482.48 2050,2300 2050,1980 2080,1950 2150,1950 2175,1975 2175,2076.25 2175,2158.75 2150,2183.75 2150,2250 ; 1000,3000 1000,2465 1589.13,2465 1616.14,2437.99 1616.14,2346.46 1670.28,2292.32 1867.13,2292.32 1889.76,2314.96 1889.76,2410.43 ; 2150.98,2250 2150.98,2606.3 ; 2560.57,1503.4 2609.25,1454.72 3330.63,1454.72 3485.57,1609.67 3485.57,2153.18 3307.09,2331.67 2690.11,2331.67 2660.37,2301.93 2660.37,2085.39 2561.94,1986.97 2560.57,1985.6 2560.57,1503.4 ; 2864.57,2253.67 2872.24,2246 3249.91,2246 3261.57,2257.67 3261.57,2313.67 3243.57,2331.67 2880.57,2331.67 2864.57,2315.67 2864.57,2253.67
L9 IntP GND (plane layer: these items are gaps in the copper):
  lines w5: 1000,2455 1600,2455 1615,2440 1615,2225
L2 IntP (plane layer: these items are gaps in the copper):
  lines w7: 2835.87,1691.69 2838.76,1691.69
  lines w10: 1769.77,2268.81 1770.67,2267.91 ; 2506.12,1937.01 2507.01,1936.12 ; 2571.85,2980.32 2571.85,2832.68 2588.58,2815.94 4443.9,2815.94 5164.37,2095.47 5340.55,2095.47 5378.94,2133.86 5497.05,2133.86 5496.06,2134.84 ; 2717.76,1652.32 2720.65,1652.32 ; 2796.5,1691.69 2799.39,1691.69 ; 4013,1868 4015,1868 ; 4066.93,1062.01 4099.41,1094.49 4099.41,1291.34

## Text inside footprints (layer, text, board x,y; h text height)
HD1: Top Overlay "o" at 1872.64,1807.36 h60; Mechanical 1 "o" at 1850,1805 h60
J2: Top Overlay "*" at 2295,1835 h60 r90
PMOD1: Mechanical 1 "o" at 1055,1150 h60 r270
PMOD2: Mechanical 1 "o" at 1405,1150 h60 r270
PMOD3: Mechanical 1 "o" at 1760,1150 h60 r270
U2: Top Overlay "o" at 1954.53,2478.94 h39.37 r180; Mechanical 15 "*" at 1991.1,2470.08 h60 r180